# Altium PCB EC20测试底板.PcbDoc
Units mm, origin at the board's own origin, x right, y up, seen from the top; angles counter-clockwise.
Board outline 68.88 x 32.79 mm, 2 copper layers (Top Layer, Bottom Layer); 33 components, 26 nets, 178 pads, 163 vias.
Unrouted connection lines stored in the file: 168.
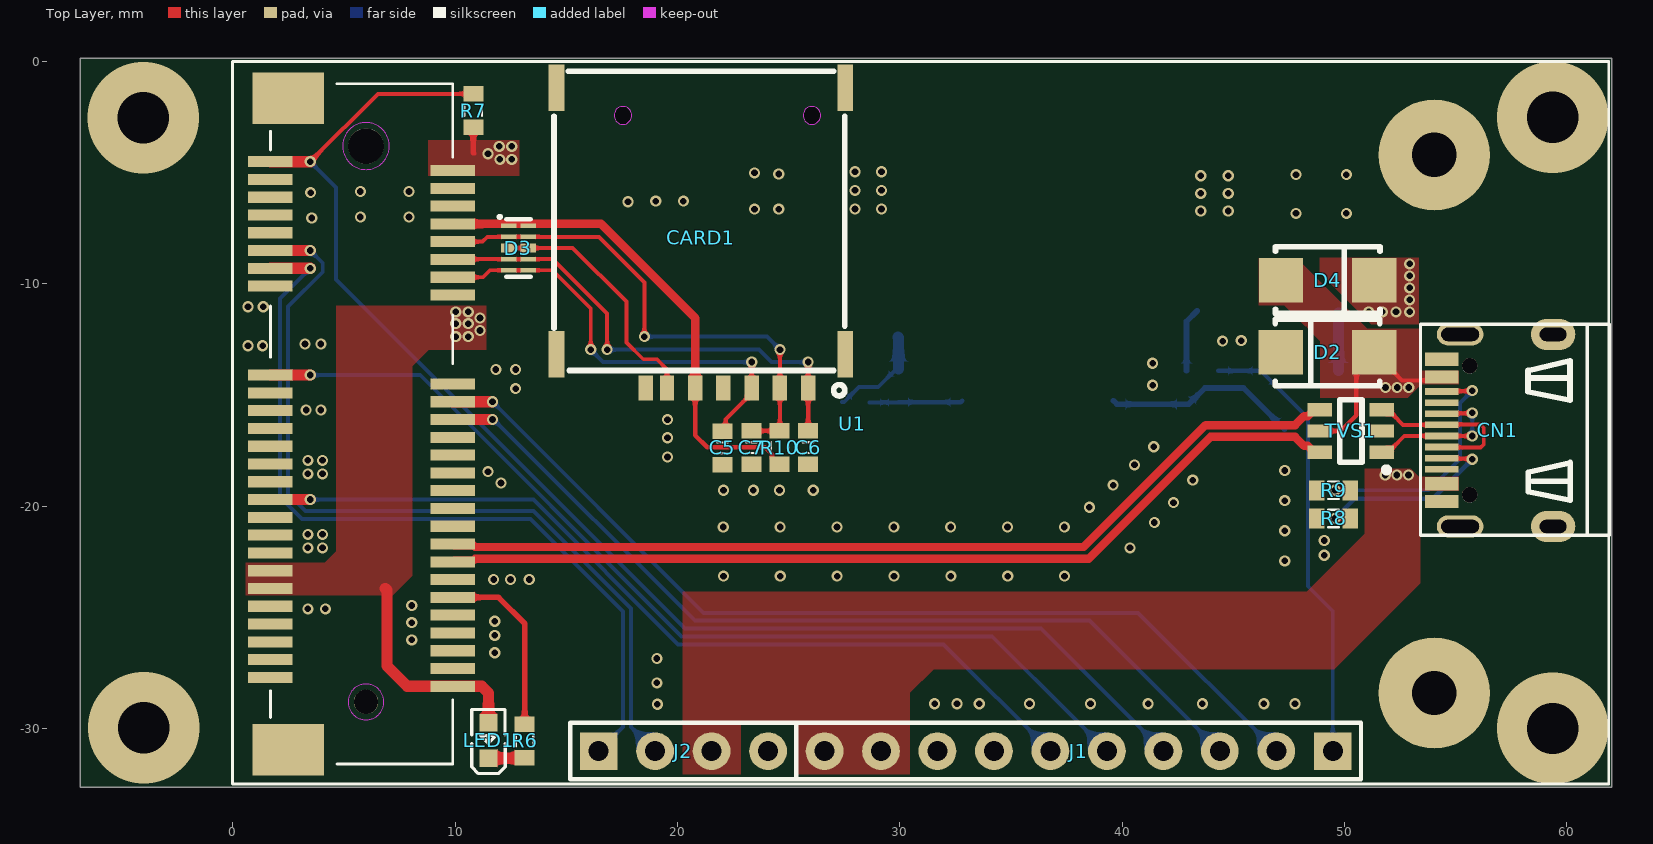
[diagram p0: Top Layer view]
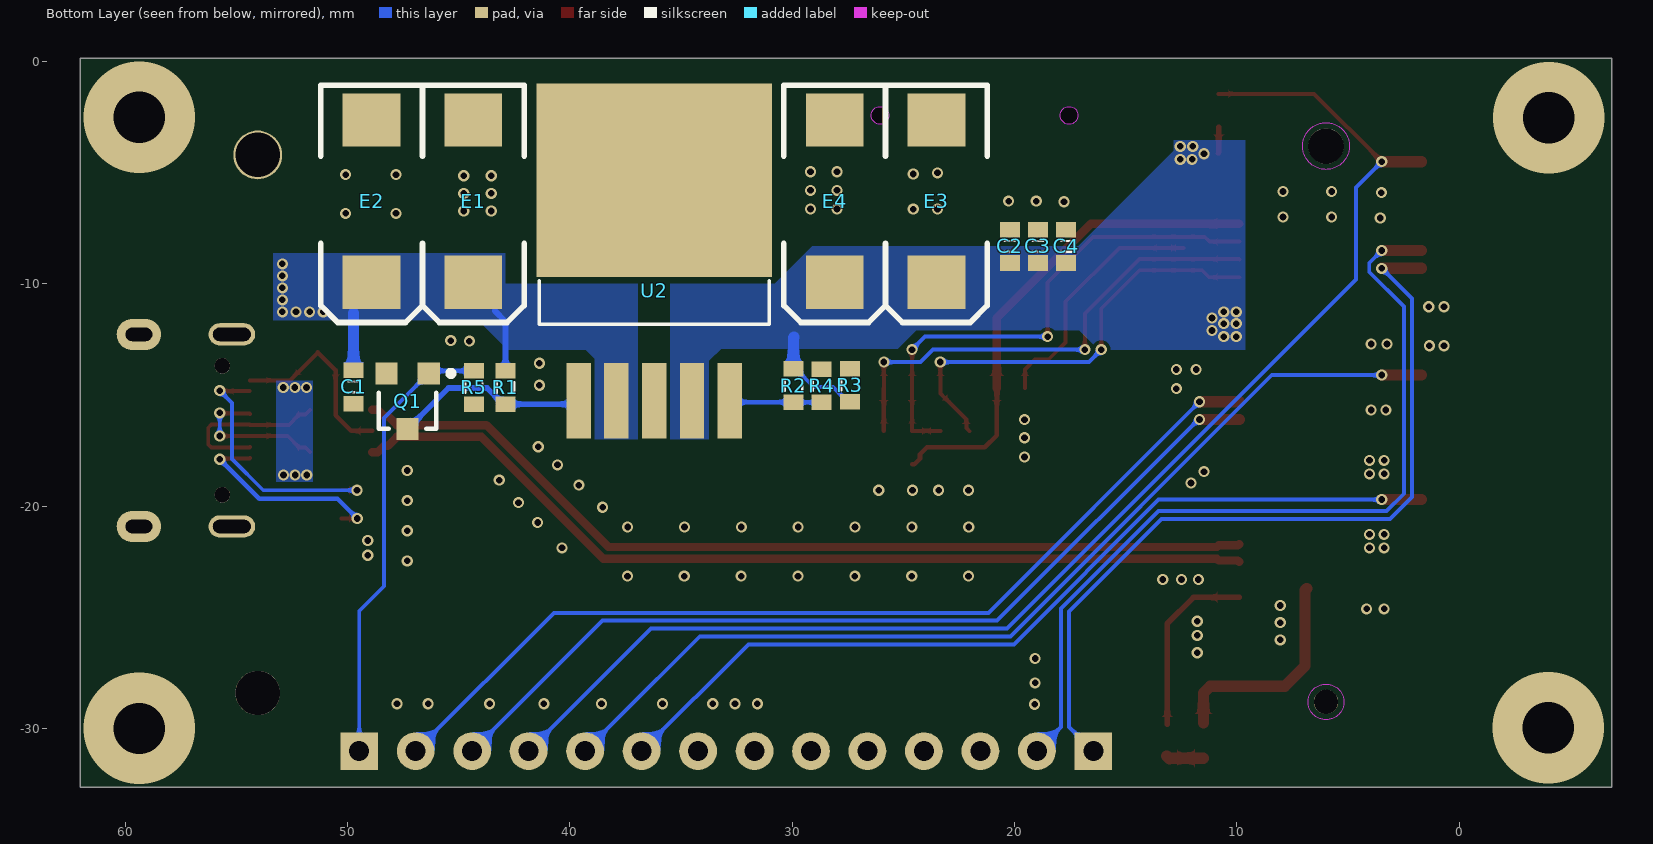
[diagram p1: Bottom Layer view, seen from below]

## Layer stack, top to bottom
Top Solder: solder mask 0.0102, Solder Resist, Dk 3.5
Top Layer: signal copper 0.0356
Dielectric 1: dielectric 0.32, FR-4, Dk 4.8
Bottom Layer: signal copper 0.0356
Bottom Solder: solder mask 0.0102, Solder Resist, Dk 3.5

## Board outline
-6.858,-32.639 62.027,-32.639 62.027,0.152 -6.858,0.152

## Design rules (kind name [scope] priority, off if disabled: settings)
Clearance [All] p1: gap=0.178 ignorepadtopadclearanceinfootprint=TRUE except(0: Arc-Hole Track-Hole SMDPad-Hole THPad-Hole Via-Hole Fill-Hole Poly-Hole Region-Hole Text-Hole)
DiffPairsRouting USB [InDifferentialPair('NewDifferentialPair1')] p1: maxlimit=0.152 minlimit=0.152 mostfreqgap=0.152 toplayer_minwidth=0.381 toplayer_maxwidth=0.381 toplayer_prefwidth=0.381 bottomlayer_minwidth=0.381 bottomlayer_maxwidth=0.381 bottomlayer_prefwidth=0.381 maxuncoupledlength=12.7
PlaneConnect [All] p1: pad.planeconnectstyle=NoConnect pad.reliefexpansion=0.508 pad.reliefentries=4 pad.reliefconductorwidth=0.254 pad.reliefairgap=0.254 via.planeconnectstyle=Direct via.reliefexpansion=0.508 via.reliefentries=4 via.reliefconductorwidth=0.254 via.reliefairgap=0.254
PolygonConnect [All] p1: connectstyle=Direct reliefconductorwidth=0.254 reliefentries=4 polygonreliefangle="90 Angle" airgapwidth=0.254
RoomDefinition EC20测试底板 [InComponentClass('EC20测试底板')] p1: confinementstyle=ConfineOut formatcopy=TRUE lockcomponents=FALSE outline -103.632,-113.36 -78.613,-113.36 -78.613,-94.056 -103.632,-94.056
RoutingVias [All] p1: holewidth=0.3 width=0.5 viastyle="Through Hole" minholewidth=0.3 minwidth=0.5 maxholewidth=777 maxwidth=777
SolderMaskExpansion [All] p1: expansion=0.102 istentingtop=FALSE
Width [All] p1: maxlimit=5.08 minlimit=0.178 preferedwidth=0.178
28 further rules are at their usual default settings.

## Classes and differential pairs
differential pair class USB_DATA: NewDifferentialPair1
differential pair NewDifferentialPair1: +USB_P -USB_N

## Components (designator, comment, footprint, x,y, rotation, side; value= is the part's Value field where it differs from the comment)
C1 "100nF" 0603-C 49.733,-14.63 r0 bottom
C2 "100nF" 0603-C 20.218,-8.306 r180 bottom
C3 "33pF" 0603-C 18.948,-8.306 r180 bottom
C4 "10pF" 0603-C 17.678,-8.306 r180 bottom
C5 "33pF" 0603-C 22.022,-17.374 r180 top
C6 "33pF" 0603-C 25.883,-17.362 r180 top
C7 "33pF" 0603-C 23.326,-17.362 r180 top
CARD1 "HYC63-SIM07-137" NANO-SIM-SMD_HYC63-SIM07-137 21.057,-7.925 r180 top locked
CN1 "Type-c" "Type-c 16pin" 57.15,-16.332 r90 top locked
D2 "SMAJ6.0CA" ZENER 49.242,-13.081 r0 top
D3 "ESD-SIM" SLP2510P8 12.852,-8.382 r270 top
D4 "SS34" SS34-SMA 49.251,-9.83 r180 top
E1 "470uF" "CD D(7343)" 44.348,-6.274 r90 bottom locked
E2 "470uF/NC" "CD D(7343)" 48.92,-6.274 r90 bottom locked
E3 "470uF" "CD D(7343)" 23.52,-6.274 r90 bottom locked
E4 "470uF/NC" "CD D(7343)" 28.092,-6.274 r90 bottom locked
J1 "HDR1.27X10" HDR2.54-LI-10P 38.049,-31.013 r180 top locked
J2 "HDR2.54X4" HDR2.54-LI-4P 20.269,-31.013 r0 top locked
LED1 "LED" LED-0603 11.506,-30.531 r90 top
Q1 "NMOS" AO3400 47.244,-15.164 r0 bottom
R1 "47K" 0603-R 42.901,-14.656 r0 bottom
R2 "82K" 0603-R 29.947,-14.568 r0 bottom
R3 "470R" 0603-R 27.407,-14.554 r180 bottom
R4 "47K" 0603-R 28.677,-14.58 r180 bottom
R5 "47K" 0603-R 44.323,-14.656 r0 bottom
R6 "10K" 0603-R 13.132,-30.556 r0 top
R7 "10K" 0603-R 10.82,-2.198 r0 top
R8 "5.1K" 0603-R 49.517,-20.549 r90 top
R9 "5.1K" 0603-R 49.517,-19.279 r270 top
R10 "10K" 0603-R 24.604,-17.362 r0 top
TVS1 "USBLC6-2SC6" USBLC6-2 50.292,-16.612 r0 top locked
U1 "EC20-CEFRG" mini-PCI_E接口 12.744,-17.324 r0 top locked
U2 "MIC29302WU" MIC29302WU 36.21,-5.317 r180 bottom locked

## Footprints (in the part's own frame and the unit in brackets; to place one, negate y for a bottom-side part, rotate by r counter-clockwise, add the part's x,y. Pads: shape width x height; smd on the part's side, far side on the other; paste and mask are expansions set on the pad)
0603-C [mm]
  rect 0.9x0.7 smd: 1(0,0.75) 2(0,-0.75)
  silkscreen extent -0.24,-0.24 0.24,0.24, body extent -0.41,-0.8 0.41,0.8, height 0.84
0603-R [mm]
  rect 0.9x0.7 smd: 1(0,0.75) 2(0,-0.75)
  silkscreen extent -0.39,-0.24 0.39,0.24, body extent -0.4,-0.8 0.4,0.8, height 0.45
AO3400 [mm]
  rect 1x1 smd: 1(-0.889,-1.143) 2(1.011,-1.143) 3(0.061,1.357)
  silkscreen extent -2.01,-1.27 1.36,1.36, body extent -1.39,-1.29 1.51,1.51, height 1.2
"CD D(7343)" [mm] "长7.3mm，宽4.3mm，厚2.8mm"
  rect 2.4x2.6 smd: 1(-3.65,0) 2(3.65,0)
  silkscreen extent -5.46,-2.29 5.21,2.29, body extent -3.65,-2.15 3.65,2.15, height 2.83
HDR2.54-LI-4P [mm] "排针，4脚"
  rect 1.7x1.7 hole 0.9: 1(-3.81,0)
  round 1.7 hole 0.9: 2(-1.27,0) 3(1.27,0) 4(3.81,0)
  silkscreen extent -5.08,-1.27 5.08,1.27, body extent -5.08,-1.27 5.08,1.27, height 2.54
HDR2.54-LI-10P [mm] "排针，10脚   淘宝ID:黄晶宝石   店铺网址:https://shop463601444.taobao.com"
  rect 1.7x1.7 hole 0.9: 1(-11.43,0)
  round 1.7 hole 0.9: 2(-8.89,0) 3(-6.35,0) 4(-3.81,0) 5(-1.27,0) 6(1.27,0) 7(3.81,0) 8(6.35,0) 9(8.89,0) 10(11.43,0)
  silkscreen extent -12.7,-1.27 12.7,1.27, body extent -12.7,-1.27 12.7,1.27, height 2.54
LED-0603 [mm]
  rect 0.8x0.8 smd: 1(-0.799,-0.003) 2(0.799,0.004)
  silkscreen extent -1.49,-0.75 1.39,0.76
MIC29302WU [mil]
  rect 43.3x133.9 smd mask+2: 1(-133.9,-391) 2(-66.9,-391) 3(0,-391) 4(66.9,-391) 5(133.9,-391)
  rect 416.8x342.7 smd mask+2: 6(0,-1)
  silkscreen extent -203,-256 203,-178
mini-PCI_E接口 [mm] "封装库来自淘宝卖家 ID：黄晶宝石"
  rect 3.2x2.3 smd: 0(-10.249,-13.623) 0(-10.249,15.677)
  rect 2x0.5 smd: 1(-11.049,12.827) 2(-2.849,12.427) 3(-11.049,12.027) 4(-2.849,11.627) 5(-11.049,11.227) 6(-2.849,10.827) 7(-11.049,10.427) 8(-2.849,10.027) 9(-11.049,9.627) 10(-2.849,9.227) 11(-11.049,8.827) 12(-2.849,8.427) 13(-11.049,8.027) 14(-2.849,7.627) 15(-11.049,7.227) 16(-2.849,6.827) 17(-11.049,3.227) 18(-2.849,2.827) 19(-11.049,2.427) 20(-2.849,2.027) 21(-11.049,1.627) 22(-2.849,1.227) 23(-11.049,0.827) 24(-2.849,0.427) 25(-11.049,0.027) 26(-2.849,-0.373) 27(-11.049,-0.773) 28(-2.849,-1.173) 29(-11.049,-1.573) 30(-2.849,-1.973) 31(-11.049,-2.373) 32(-2.849,-2.773) 33(-11.049,-3.173) 34(-2.849,-3.573) 35(-11.049,-3.973) 36(-2.849,-4.373) 37(-11.049,-4.773) 38(-2.849,-5.173) 39(-11.049,-5.573) 40(-2.849,-5.973) 41(-11.049,-6.373) 42(-2.849,-6.773) 43(-11.049,-7.173) 44(-2.849,-7.573) 45(-11.049,-7.973) 46(-2.849,-8.373) 47(-11.049,-8.773) 48(-2.849,-9.173) 49(-11.049,-9.573) 50(-2.849,-9.973) 51(-11.049,-10.373) 52(-2.849,-10.773)
  round 5 / inner round 2.2 / far side round 2 hole 2 mask+0.102: 35(41.301,-11.073)
  round 5 / inner round 2.2 / far side round 2.2 hole 2 mask+0.102: 35(41.301,13.127)
  round 1.6 hole 1.6 unplated: 55(-6.749,13.527)
  round 1.1 hole 1.1 unplated: 56(-6.749,-11.473)
  Keep-Out Layer pour cut-out: -6.749,-12.277 -6.7,-12.276 -6.652,-12.271 -6.604,-12.264 -6.557,-12.254 -6.51,-12.241 -6.464,-12.225 -6.419,-12.207 -6.375,-12.185 -6.333,-12.161 -6.292,-12.135 -6.253,-12.106 -6.216,-12.075 -6.18,-12.042 -6.147,-12.006 -6.116,-11.969 -6.087,-11.93 -6.061,-11.889 -6.037,-11.847 -6.015,-11.803 -5.997,-11.758 -5.981,-11.712 -5.968,-11.665 -5.958,-11.618 -5.951,-11.57 -5.946,-11.522 -5.945,-11.473 -5.946,-11.424 -5.951,-11.376 -5.958,-11.328 -5.968,-11.281 -5.981,-11.234 -5.997,-11.188 -6.015,-11.143 -6.037,-11.099 -6.061,-11.057 -6.087,-11.016 -6.116,-10.977 -6.147,-10.94 -6.18,-10.904 -6.216,-10.871 -6.253,-10.84 -6.292,-10.811 -6.333,-10.785 -6.375,-10.761 -6.419,-10.739 -6.464,-10.721 -6.51,-10.705 -6.557,-10.692 -6.604,-10.682 -6.652,-10.674 -6.7,-10.67 -6.749,-10.669 -6.798,-10.67 -6.846,-10.674 -6.894,-10.682 -6.941,-10.692 -6.988,-10.705 -7.034,-10.721 -7.079,-10.739 -7.123,-10.761 -7.165,-10.785 -7.206,-10.811 -7.245,-10.84 -7.282,-10.871 -7.318,-10.904 -7.351,-10.94 -7.382,-10.977 -7.411,-11.016 -7.437,-11.057 -7.461,-11.099 -7.483,-11.143 -7.501,-11.188 -7.517,-11.234 -7.53,-11.281 -7.54,-11.328 -7.548,-11.376 -7.552,-11.424 -7.553,-11.473 -7.552,-11.522 -7.548,-11.57 -7.54,-11.618 -7.53,-11.665 -7.517,-11.712 -7.501,-11.758 -7.483,-11.803 -7.461,-11.847 -7.437,-11.889 -7.411,-11.93 -7.382,-11.969 -7.351,-12.006 -7.318,-12.042 -7.282,-12.075 -7.245,-12.106 -7.206,-12.135 -7.165,-12.161 -7.123,-12.185 -7.079,-12.207 -7.034,-12.225 -6.988,-12.241 -6.941,-12.254 -6.894,-12.264 -6.846,-12.271 -6.798,-12.276 -6.749,-12.277
  Keep-Out Layer pour cut-out: -6.749,12.473 -6.694,12.474 -6.639,12.478 -6.584,12.486 -6.53,12.496 -6.476,12.509 -6.423,12.524 -6.371,12.543 -6.32,12.564 -6.27,12.588 -6.222,12.614 -6.175,12.643 -6.129,12.674 -6.085,12.708 -6.043,12.743 -6.003,12.781 -5.965,12.821 -5.93,12.863 -5.896,12.907 -5.865,12.953 -5.836,13 -5.81,13.048 -5.786,13.098 -5.765,13.149 -5.746,13.201 -5.731,13.254 -5.718,13.308 -5.708,13.362 -5.7,13.417 -5.696,13.472 -5.695,13.527 -5.696,13.582 -5.7,13.637 -5.708,13.692 -5.718,13.746 -5.731,13.8 -5.746,13.853 -5.765,13.905 -5.786,13.956 -5.81,14.006 -5.836,14.054 -5.865,14.101 -5.896,14.147 -5.93,14.191 -5.965,14.233 -6.003,14.273 -6.043,14.311 -6.085,14.346 -6.129,14.38 -6.175,14.411 -6.222,14.44 -6.27,14.466 -6.32,14.49 -6.371,14.511 -6.423,14.53 -6.476,14.545 -6.53,14.558 -6.584,14.568 -6.639,14.576 -6.694,14.58 -6.749,14.581 -6.804,14.58 -6.859,14.576 -6.914,14.568 -6.968,14.558 -7.022,14.545 -7.075,14.53 -7.127,14.511 -7.178,14.49 -7.228,14.466 -7.276,14.44 -7.323,14.411 -7.369,14.38 -7.413,14.346 -7.455,14.311 -7.495,14.273 -7.533,14.233 -7.568,14.191 -7.602,14.147 -7.633,14.101 -7.662,14.054 -7.688,14.006 -7.712,13.956 -7.733,13.905 -7.752,13.853 -7.767,13.8 -7.78,13.746 -7.79,13.692 -7.798,13.637 -7.802,13.582 -7.803,13.527 -7.802,13.472 -7.798,13.417 -7.79,13.362 -7.78,13.308 -7.767,13.254 -7.752,13.201 -7.733,13.149 -7.712,13.098 -7.688,13.048 -7.662,13 -7.633,12.953 -7.602,12.907 -7.568,12.863 -7.533,12.821 -7.495,12.781 -7.455,12.743 -7.413,12.708 -7.369,12.674 -7.323,12.643 -7.276,12.614 -7.228,12.588 -7.178,12.564 -7.127,12.543 -7.075,12.524 -7.022,12.509 -6.968,12.496 -6.914,12.486 -6.859,12.478 -6.804,12.474 -6.749,12.473
  silkscreen extent -12.75,-15.17 49.15,17.33
NANO-SIM-SMD_HYC63-SIM07-137 [mil]
  rect 25.6x44.5 smd mask+2: 1(10,266) 2(-90,266) 3(-190,266) 5(60,266) 6(-40,266) 7(-140,266) 9(97.4,266)
  rect 27.6x82.7 smd mask+2: 10(-255.7,206.4) 11(255.7,206.4) 12(-255.7,-266) 13(255.7,-266)
  Keep-Out Layer board cut-out: 153.7,-216.8 152.15,-209.99 147.79,-204.53 141.49,-201.49 134.51,-201.49 128.21,-204.53 123.85,-209.99 122.3,-216.8 122.3,-216.8 123.85,-223.61 128.21,-229.07 134.51,-232.11 141.49,-232.11 147.79,-229.07 152.15,-223.61 153.7,-216.8
  Keep-Out Layer board cut-out: -180.9,-216.8 -182.45,-209.99 -186.81,-204.53 -193.11,-201.49 -200.09,-201.49 -206.39,-204.53 -210.75,-209.99 -212.3,-216.8 -212.3,-216.8 -210.75,-223.61 -206.39,-229.07 -200.09,-232.11 -193.11,-232.11 -186.81,-229.07 -182.45,-223.61 -180.9,-216.8
  silkscreen extent -255,-295 260,280
SLP2510P8 [mm]
  rect 0.201x0.681 smd mask+0.051: 1(-1.001,-0.439) 2(-0.5,-0.439) 4(0.5,-0.439) 5(1.001,-0.439) 6(1.001,0.439) 7(0.5,0.439) 9(-0.5,0.439) 10(-1.001,0.439)
  rect 0.399x0.681 smd mask+0.051: 3(0,-0.439) 8(0,0.439)
  silkscreen extent -1.44,-0.88 1.3,0.55
SS34-SMA [mm]
  rect 2x2 smd: 1(2.1,0) 2(-2.1,0)
  silkscreen extent -2.35,-1.5 2.35,1.5, body extent -2.74,-1.38 2.76,1.42, height 2.6
"Type-c 16pin" [mm]
  oval 1.4x2 hole 0.6 slot 1.2 at 90 deg: 0(-4.574,-2.239) 0(4.066,-2.239)
  oval 1x2.1 hole 0.6 slot 1.7 at 90 deg: 0(-4.574,1.941) 0(4.066,1.941)
  rect 0.3x1.5 smd: A1(-3.604,2.761) A4(-2.804,2.761) A5(-1.504,2.761) A6(-0.504,2.761) A7(-0.004,2.761) A8(0.996,2.761) A9(2.296,2.761) A12(3.096,2.761) B1(2.796,2.761) B4(1.996,2.761) B5(1.496,2.761) B6(0.496,2.761) B7(-1.004,2.761) B8(-2.004,2.761) B9(-2.504,2.761) B12(-3.304,2.761)
  round 0.7 hole 0.7: D(-3.154,1.511) D(2.646,1.511)
  silkscreen extent -4.97,-4.77 4.53,3.72
USBLC6-2 [mm]
  rect 1.1x0.6 smd: 1(1.4,-0.95) 2(1.4,0) 3(1.4,0.95) 4(-1.4,0.95) 5(-1.4,0) 6(-1.4,-0.95)
  silkscreen extent -0.5,-1.87 1.73,1.4, body extent -1.19,-1.4 1.24,1.4, height 1.09
ZENER [mm]
  rect 2x2 smd: 1(2.1,0) 2(-2.1,0)
  silkscreen extent -2.35,-1.5 2.35,1.5, body extent -2.79,-1.43 2.71,1.37, height 2.6

## Part data
C1 C2 C3 C4 C5 C6 C7: library part C, "贴片电容", BOM名称=无极性贴片电容, 联系卖家，免费查找封装=唯一出售店铺网址https://shop463601444.taobao.com
CARD1: library part NanoSIM卡座, "自弹式 NanoSIM卡 卡座 带CD PIN 带柱", JLCPCB Part Class="Extended Part", Manufacturer=华宇创, Operating Temperature Range=-20℃~+60℃, Add into BOM=yes, Body Height (Max)=1.25mm, Card Connection Mode=自弹式, Card Type=NanoSIM卡, Connector Type=卡座, Contact Material=-, Contact Plating=-, Convert to PCB=yes, Datasheet=https://atta.szlcsc.com/upload/public/pdf/source/20200616/C645507_89E3671A4105357B007331596DCB72F5.pdf, Device=HYC63-SIM07-137, LCSC Part Name="自弹式 NanoSIM卡 卡座 带CD PIN 带柱", Manufacturer Part=HYC63-SIM07-137, Name=HYC63-SIM07-137, Supplier=LCSC, Supplier Footprint=SMD, Supplier Part=C645507, Symbol=HYC63-SIM07-137
CN1: "U262-161N-4BVC11"
D2: "SMAJ6.0CA_C698928", BOM_JLCPCB Part Class="Extended Part", BOM_Manufacturer="Yangzhou Yangjie Elec Tech", BOM_Manufacturer Part=SMAJ6.0CA, BOM_Supplier=LCSC, BOM_Supplier Part=C698928, Contributor=LCSC, spicePre=D, spiceSymbolName=SMAJ6.0CA_C698928
D3: "RClamp0524PATCT", Breakdown Voltage (VBR)=6V, Clamping Voltage@Ipp=15V, JLCPCB Part Class="Extended Part", Junction Capacitance(Cj)@1MHz=0.8pF@1MHz, Manufacturer=SEMTECH, Operating Temperature=-55℃~+125℃@(Tj), Peak Pulse Power(Ppp)@8/20us=150W, Reverse Stand-Off Voltage (Vrwm)=5V, Add into BOM=yes, Convert to PCB=yes, Datasheet=https://atta.szlcsc.com/upload/public/pdf/source/20150124/1457707260739.pdf, Device=RClamp0524PATCT_C40960, LCSC Part Name=RClamp0524PATCT, Manufacturer Part=RClamp0524PATCT, Name=RClamp0524PATCT, Supplier=LCSC, Supplier Footprint=SLP2510P8, Supplier Part=C40960, Symbol=RClamp0524PATCT
D4 LED1: BOM_JLCPCB Part Class="Extended Part", BOM_Manufacturer="Wuxi ARK Tech Elec", BOM_Manufacturer Part=D-G060306G1-KS2, BOM_Supplier=LCSC, BOM_Supplier Part=C118334, Contributor=LCSC, spicePre=L, spiceSymbolName=D-G060306G1-KS2
E1 E2 E3 E4: library part CT, "贴片钽电容", BOM名称=贴片钽电容, 联系卖家，免费查找封装=唯一出售店铺网址https://shop463601444.taobao.com
J1: library part HDR2.54X10, BOM_JLCPCB Part Class="Extended Part", BOM_Manufacturer=BOOMELE, BOM_Manufacturer Part=1.27mm/1*3p, BOM_Supplier=LCSC, BOM_Supplier Part=C24980, spicePre=P, spiceSymbolName=1.27mm/1*3p
J2: BOM_JLCPCB Part Class="Extended Part", BOM_Manufacturer=BOOMELE, BOM_Manufacturer Part=1.27mm/1*3p, BOM_Supplier=LCSC, BOM_Supplier Part=C24980, spicePre=P, spiceSymbolName=1.27mm/1*3p
Q1: library part AO3400, "N沟道 30V/4.2A", BOM名称=场效应管, 参数="N沟道 30V/4.2A", 联系卖家，免费查找封装=唯一出售店铺网址https://shop463601444.taobao.com
R1 R2 R3 R4 R5 R6 R7 R8 R9 R10: library part R, "贴片电阻", BOM名称=贴片电阻, 联系卖家，免费查找封装=唯一出售店铺网址https://shop463601444.taobao.com
TVS1: "USBLC6-2SC6_C2687116", BOM_JLCPCB Part Class="Extended Part", BOM_Manufacturer=UMW(友台半导体), BOM_Manufacturer Part=USBLC6-2SC6, BOM_Supplier=LCSC, BOM_Supplier Part=C2687116, Contributor=LCSC, spicePre=D, spiceSymbolName=USBLC6-2SC6_C2687116
U2: JLCPCB Part Class="Extended Part", LCSC Part Name="3A Fast-Response LDO Regulator", Manufacturer=UMW(友台半导体), Add into BOM=yes, Convert to PCB=yes, Datasheet=https://atta.szlcsc.com/upload/public/pdf/source/20220414/64A379364ACD2069C59BD188E91B8798.pdf, Device=MIC29302WU, Manufacturer Part=MIC29302WU, Name=MIC29302WU, Supplier=LCSC, Supplier Footprint=TO-263, Supplier Part=C2995533, Symbol=MIC29302WU_C2995533

## Via types
v1: diameter 0.5, hole 0.3, Top Layer to Bottom Layer, tented both sides, 159 vias
v2: diameter 5, hole 2.3, Top Layer to Bottom Layer, tented top, 4 vias

## Nets (pads, with @x,y where several pads share a name; then routed paths per layer and width w, separated by ;. In a path a pad name is that pad's centre, name@x,y a point inside that pad or via, vN(x,y) a via of type N, cw(c..) or ccw(c..) an arc to the next point about the centre after c; other vN are vias at no path point)
DM: CN1.A7 CN1.B7 TVS1.3 | length 7.6
  Top Layer w0.178: TVS1.3 51.903,-15.873 52.18,-15.873 52.644,-16.336 CN1.A7 54.409,-16.315 56.117,-16.315 56.27,-16.468 56.27,-17.213 56.125,-17.357 54.409,-17.357 CN1.B7
DP: CN1.A6 CN1.B6 TVS1.1 | length 6.8
  Top Layer w0.178: TVS1.1 51.903,-17.35 52.18,-17.35 52.695,-16.836 CN1.A6 54.391,-16.838 55.751,-16.838 v1(55.753,-16.84) ; CN1.B6@54.391,-15.838 54.411,-15.817 55.734,-15.817 v1(55.753,-15.799)
  Bottom Layer w0.178: v1(55.753,-16.84) v1(55.753,-15.799)
DTR: J1.6 U1.31 | length 39.8
  Top Layer w0.508: U1.31 v1(3.484,-19.697)
  Bottom Layer w0.178: v1(3.484,-19.697) 13.52,-19.697 20.035,-26.213 31.979,-26.213 J1.6
EC20-RXD: J2.2 U1.11 | length 38
  Top Layer w0.508: U1.11 v1(3.484,-8.497)
  Bottom Layer w0.178: v1(3.484,-8.497) 4.049,-9.062 4.049,-9.463 2.489,-11.023 2.489,-19.436 3.271,-20.218 13.538,-20.218 17.907,-24.587 17.907,-29.921 J2.2
EC20-TXD: J2.1 U1.13 | length 36.9
  Top Layer w0.508: U1.13 v1(3.484,-9.297)
  Bottom Layer w0.178: v1(3.484,-9.297) 2.134,-10.648 2.134,-19.583 3.124,-20.574 13.386,-20.574 17.551,-24.74 17.551,-29.921 J2.1
GND: C1.1 C2.1 C3.1 C4.1 C5.1 C6.1 C7.1 CARD1.5 CARD1.10 CARD1.11 CARD1.12 CARD1.13 CN1.0 CN1.A1 CN1.A12 CN1.B1 CN1.B12 D2.2 D3.3 D3.8 E1.2 E2.2 E3.2 E4.2 J1.7 J1.8 J2.4 Q1.2 R3.1 R4.1 R5.1 R8.1 R9.2 TVS1.2 U1.0 U1.4 U1.9 U1.15 U1.18 U1.21 U1.26 U1.27 U1.29 U1.35 U1.37 U1.40 U1.43 U1.50 U2.3 U2.6 | length 11.3
  Top Layer w0.178: D3.3 D3.8 15.291,-8.382 17.704,-10.795 17.704,-12.624 18.466,-13.386 19.075,-13.386 19.533,-13.843 CARD1.5
  other v1: 19.101,-28.905 31.572,-28.88 32.575,-28.88 33.579,-28.88 35.839,-28.88 38.583,-28.88 41.173,-28.88 43.612,-28.88 46.38,-28.88 47.777,-28.88 19.075,-27.94 19.075,-26.848 11.786,-26.586 8.052,-26.01 11.786,-25.806 8.052,-25.235 11.786,-25.171 3.378,-24.613 4.166,-24.613 8.052,-24.46 11.735,-23.292 12.497,-23.292 13.335,-23.292 22.073,-23.139 24.63,-23.139 27.186,-23.139 29.743,-23.139 32.3,-23.139 34.857,-23.139 37.414,-23.139 47.32,-22.454 49.098,-22.2 3.378,-21.869 4.039,-21.869 40.361,-21.869 49.098,-21.539 3.378,-21.26 4.039,-21.26 47.32,-21.099 22.065,-20.93 24.622,-20.93 27.179,-20.93 29.735,-20.93 32.292,-20.93 34.849,-20.93 37.406,-20.93 41.453,-20.726 38.532,-20.041 42.316,-19.837 47.32,-19.744 22.073,-19.279 23.419,-19.279 24.595,-19.279 26.111,-19.279 39.599,-19.05 12.065,-18.948 43.18,-18.821 3.378,-18.542 4.039,-18.542 11.481,-18.44 47.32,-18.39 40.564,-18.136 3.378,-17.933 4.039,-17.933 19.558,-17.78 41.427,-17.323 19.558,-16.916 19.558,-16.104 3.302,-15.672 3.962,-15.672 12.725,-14.707 41.377,-14.554 11.836,-13.843 12.725,-13.843 41.377,-13.564 0.686,-12.776 1.346,-12.776 3.251,-12.7 3.962,-12.7 44.526,-12.573 45.364,-12.548 0.686,-11.024 1.372,-11.024 3.556,-7.036 5.74,-6.985 7.925,-6.985 47.828,-6.824 50.089,-6.824 43.541,-6.718 44.78,-6.718 23.47,-6.636 24.562,-6.636 27.991,-6.629 29.185,-6.629 17.78,-6.299 19.025,-6.274 20.269,-6.274 43.541,-5.925 44.78,-5.925 3.505,-5.893 5.74,-5.842 7.925,-5.842 27.991,-5.791 29.185,-5.791 43.541,-5.131 44.78,-5.131 47.828,-5.08 50.089,-5.08 24.562,-5.055 23.47,-5.004 27.991,-4.953 29.185,-4.953
  other v2: 59.374,-29.987 -4,-29.961 -4.025,-2.525 59.374,-2.5
LED_WWAN#: R6.1 U1.42 | length 8.3
  Top Layer w0.254: U1.42 11.956,-24.097 13.132,-25.273 R6.1
NetCN1_A5: CN1.A5 R8.2 | length 9.4
  Top Layer w0.178: v1(49.567,-20.549) R8.2 ; CN1.A5 54.411,-17.859 55.73,-17.859 v1(55.753,-17.882)
  Bottom Layer w0.203: v1(49.567,-20.549) 50.456,-19.66 53.975,-19.66 v1(55.753,-17.882)
NetCN1_B5: CN1.B5 R9.1 | length 11.5
  Top Layer w0.178: v1(49.581,-19.279) R9.1@50.28,-19.279 ; CN1.B5@54.409,-14.815 v1@55.732,-14.815
  Bottom Layer w0.178: v1(49.581,-19.279) 53.797,-19.279 55.194,-17.882 55.194,-15.354 v1(55.751,-14.797)
NetLED1_1: LED1.1 R6.2 | length 1.7
  Top Layer w0.508: LED1.1 R6.2@13.033,-31.33 ; R6.2@13.033,-31.356 R6.2@13.159,-31.23
NetQ1_3: Q1.3 R1.1 U2.1 | length 8.8
  Bottom Layer w0.254: U2.1 39.768,-15.406 43.001,-15.406 43.725,-14.681 45.465,-14.681 Q1.3
NetR2_1: R2.1 R4.2 U2.5 | length 4.2
  Bottom Layer w0.178: R4.2@28.651,-15.33 29.935,-15.33 R2.1
  Bottom Layer w0.203: R2.1 32.74,-15.318 U2.5
PERST#: J1.3 U1.22 | length 40.7
  Top Layer w0.508: U1.22 v1(11.684,-16.097)
  Bottom Layer w0.178: v1(11.684,-16.097) 11.739,-16.097 20.787,-25.146 38.532,-25.146 J1.3
PWOER_ON: J1.1 Q1.1 R5.2 | length 20.4
  Bottom Layer w0.178: Q1.1 48.362,-16.027 48.362,-23.597 49.479,-24.715 J1.1
  Bottom Layer w0.203: R5.2 46.24,-13.906 Q1.1
RI: J1.5 U1.17 | length 44.6
  Top Layer w0.508: U1.17 v1(3.484,-14.097)
  Bottom Layer w0.178: v1(3.484,-14.097) 8.433,-14.097 20.193,-25.857 34.163,-25.857 37.925,-29.62 J1.5
USB_N: TVS1.4 U1.36 | length 41.6
  Top Layer w0.381: U1.36 9.954,-21.757 10.823,-21.757 10.897,-21.831 38.273,-21.831 43.759,-16.345 47.788,-16.345 48.189,-15.943 48.36,-15.943 48.642,-15.662 TVS1.4
USB_P: TVS1.6 U1.38 | length 41.6
  Top Layer w0.381: U1.38 9.954,-22.438 10.823,-22.438 10.897,-22.364 38.494,-22.364 43.98,-16.878 47.788,-16.878 48.189,-17.28 48.36,-17.28 48.642,-17.562 TVS1.6
USIM_CLK: C6.2 CARD1.3 D3.4 D3.7 U1.12 | length 22
  Top Layer w0.178: U1.12 9.909,-8.884 12.413,-8.884 13.291,-8.884 D3.7 14.389,-8.882 16.84,-11.334 v1(16.84,-12.954) ; CARD1.3 v1(25.883,-13.513)
  Top Layer w0.203: C6.2 CARD1.3
  Bottom Layer w0.178: v1(16.84,-12.954) 23.673,-12.954 24.232,-13.513 v1(25.883,-13.513)
USIM_DATA: C7.2 CARD1.7 D3.2 D3.9 R10.1 U1.10 | length 23.3
  Top Layer w0.178: U1.10 11.232,-8.097 11.448,-7.882 D3.2 D3.9 16.467,-7.882 18.517,-9.931 v1(18.517,-12.37) ; C7.2 R10.1 24.613,-16.603 CARD1.7 v1(24.613,-12.954)
  Bottom Layer w0.178: v1(18.517,-12.37) 24.028,-12.37 v1(24.613,-12.954)
USIM_RST: C5.2 CARD1.2 D3.5 D3.6 U1.14 | length 20
  Top Layer w0.178: U1.14 11.252,-9.697 11.567,-9.383 D3.5 D3.6 14.387,-9.383 16.104,-11.1 v1(16.104,-12.954) ; C5.2 22.17,-16.475 22.17,-16.088 23.113,-15.145 23.119,-15.145 23.343,-14.921 v1(23.343,-13.513)
  Bottom Layer w0.178: v1(16.104,-12.954) 16.662,-13.513 v1(23.343,-13.513)
USIM_VDD: CARD1.1 D3.1 D3.10 R10.2 U1.8 | length 22.4
  Top Layer w0.203: CARD1.1 20.803,-16.815 21.336,-17.348 23.941,-17.348 24.256,-17.663 24.256,-17.863 24.504,-18.112 R10.2
  Top Layer w0.381: U1.8 9.899,-7.294 12.413,-7.294 13.292,-7.294 16.565,-7.294 20.803,-11.532 CARD1.1
VBUS#1: CN1.A4 CN1.A9 CN1.B4 CN1.B9 D2.1 D4.1 J1.9 J1.10 J2.3 TVS1.5 | length 8.7
  Top Layer w0.178: D2.1 52.598,-14.336 CN1.B4
  Top Layer w0.203: TVS1.5 49.835,-16.612 50.546,-15.9 50.546,-13.877 D2.1
  other v1: 51.841,-18.593 52.362,-18.593 52.883,-18.593 51.854,-14.656 52.375,-14.656 52.895,-14.656
VCC-3.3V#1: C2.2 C3.2 C4.2 E3.1 E4.1 LED1.2 R2.2 R3.2 R7.2 U1.2 U1.39 U1.41 U1.52 U2.4 | length 15.7
  Top Layer w0.178: 10.82,-4.089 10.871,-4.14
  Top Layer w0.254: 10.82,-4.089 R7.2
  Top Layer w0.508: 6.858,-23.698 6.934,-23.774 6.934,-27.178 7.854,-28.097 11.205,-28.097 11.503,-28.395 LED1.2
  Bottom Layer w0.178: R3.2 27.507,-15.304 27.769,-15.041 27.769,-15.034 28.173,-14.63 29.034,-14.63 29.847,-13.818 R2.2
  Bottom Layer w0.508: 29.921,-12.395 29.947,-12.421 R2.2
  other v1: 10.033,-12.37 10.592,-12.37 11.125,-12.09 10.033,-11.786 10.592,-11.786 11.125,-11.532 10.033,-11.252 10.592,-11.252 12.014,-4.394 12.548,-4.394 11.481,-4.14 11.989,-3.81 12.548,-3.81
VCC-5.0V#1: C1.2 D4.2 E1.1 E2.1 R1.2 U2.2 | length 5.5
  Bottom Layer w0.178: 49.733,-11.303 49.759,-11.278
  Bottom Layer w0.254: R1.2 42.901,-11.684 43.383,-11.201
  Bottom Layer w0.508: C1.2 49.733,-11.303
  other v1: 51.096,-11.252 51.71,-11.252 52.324,-11.252 52.938,-11.252 52.938,-10.712 52.938,-10.173 52.938,-9.633 52.938,-9.093
W_DISABLE#: J1.2 U1.20 | length 43.6
  Top Layer w0.508: U1.20 v1(11.684,-15.297)
  Bottom Layer w0.178: v1(11.684,-15.297) 21.177,-24.79 40.716,-24.79 J1.2
WAKE#: J1.4 R7.1 U1.1 | length 62.2
  Top Layer w0.178: v1(3.484,-4.497) 6.534,-1.448 R7.1
  Top Layer w0.508: U1.1 v1(3.484,-4.497)
  Bottom Layer w0.178: v1(3.484,-4.497) 4.648,-5.662 4.648,-9.804 20.345,-25.502 36.347,-25.502 J1.4
pads on no net: CARD1.6 CARD1.9 CN1.A8 CN1.B8 CN1.D U1.3 U1.5 U1.6 U1.7 U1.16 U1.19 U1.23 U1.24 U1.25 U1.28 U1.30 U1.32 U1.33 U1.34 U1.44 U1.45 U1.46 U1.47 U1.48 U1.49 U1.51 U1.55 U1.56
copper on no net:
  other v1: 5.995,-28.797

## Polygon pours and split planes (outlines as drawn)
VBUS#1 on Top Layer "VBUS#1_L01_P015" (solid, pour order 15): 20.244,-23.851 48.311,-23.851 50.927,-21.234 50.927,-18.313 52.984,-18.313 53.416,-18.745 53.416,-23.47 49.555,-27.33 31.521,-27.33 30.455,-28.397 30.455,-32.055 25.375,-32.055 25.375,-29.82 22.86,-29.82 22.86,-32.055 20.244,-32.055
VCC-3.3V#1 on Top Layer "VCC-3.3V#1_L01_P013" (solid, pour order 13): 11.405,-10.973 4.648,-10.973 4.648,-22.022 2.667,-24.003 7.188,-24.003 8.077,-23.114 8.077,-13.691 8.814,-12.954 11.405,-12.954
VCC-3.3V#1 on Top Layer "VCC-3.3V#1_L01_P012" (solid, pour order 12): 8.788,-5.131 8.788,-3.531 12.878,-3.531 12.878,-5.131
VCC-3.3V#1 on Top Layer "VCC-3.3V#1_L01_P008" (solid, pour order 8): 4.597,-22.53 4.597,-24.003 0.584,-24.003 0.584,-22.53
VCC-5.0V#1 on Top Layer "VCC-5.0V#1_L01_P003" (solid, pour order 3): 53.34,-8.814 53.34,-11.811 51.206,-11.811 48.895,-9.5 48.895,-8.814
VBUS#1 on Top Layer "VBUS#1_L01_P001" (solid, pour order 1): 53.34,-18.669 52.984,-18.313 51.562,-18.313 51.562,-19.304 53.467,-19.304 55.143,-19.304 55.143,-18.669
VBUS#1 on Top Layer "VBUS#1_L01_P000" (solid, pour order 0): 46.152,-8.839 46.152,-10.947 47.295,-10.947 48.92,-12.573 48.92,-15.113 52.857,-15.113 53.467,-14.503 55.143,-14.503 55.143,-13.894 53.492,-13.894 53.34,-13.741 53.34,-12.014 51.029,-12.014 49.962,-10.947 47.854,-8.839
VCC-3.3V#1 on Bottom Layer "VCC-3.3V#1_L02_P011" (solid, pour order 11): 17.704,-8.306 17.145,-8.306 12.852,-4.013 12.852,-3.531 9.627,-3.531 9.627,-12.954 16.231,-12.954 17.704,-11.481
VCC-3.3V#1 on Bottom Layer "VCC-3.3V#1_L02_P006" (solid, pour order 6): 35.484,-16.993 35.484,-9.982 30.785,-9.982 30.201,-9.398 29.108,-8.306 17.094,-8.306 17.094,-12.09 18.948,-12.09 24.435,-12.09 25.248,-12.903 33.198,-12.903 33.757,-13.462 33.757,-16.993
VCC-5.0V#1 on Bottom Layer "VCC-5.0V#1_L02_P005" (solid, pour order 5): 44.145,-10.922 43.205,-9.982 36.957,-9.982 36.957,-16.993 38.887,-16.993 38.887,-13.36 39.294,-12.954 42.799,-12.954 44.145,-11.608
VCC-5.0V#1 on Bottom Layer "VCC-5.0V#1_L02_P004" (solid, pour order 4): 53.34,-8.611 53.34,-11.633 42.901,-11.633 42.901,-8.611
VBUS#1 on Bottom Layer "VBUS#1_L02_P002" (solid, pour order 2): 51.562,-14.351 51.562,-18.898 53.213,-18.898 53.213,-14.351

## Silkscreen, mask and mechanical layers (free items; w line width, h text height)
Mechanical 1:
  lines w0.127: -6.858,-32.639 -0.152,-32.639 62.027,-32.639 62.027,0.152 1.778,0.152 -0.152,0.152 -6.858,0.152 -6.858,-32.639